# Altium PCB MocKhoaTraiTim.PcbDoc
Units mil, origin at the board's own origin, x right, y up, seen from the top; angles counter-clockwise.
Board outline 2004.38 x 2043.36 mil, 2 copper layers (Top Layer, Bottom Layer); 49 components, 37 nets, 128 pads, 3 vias.
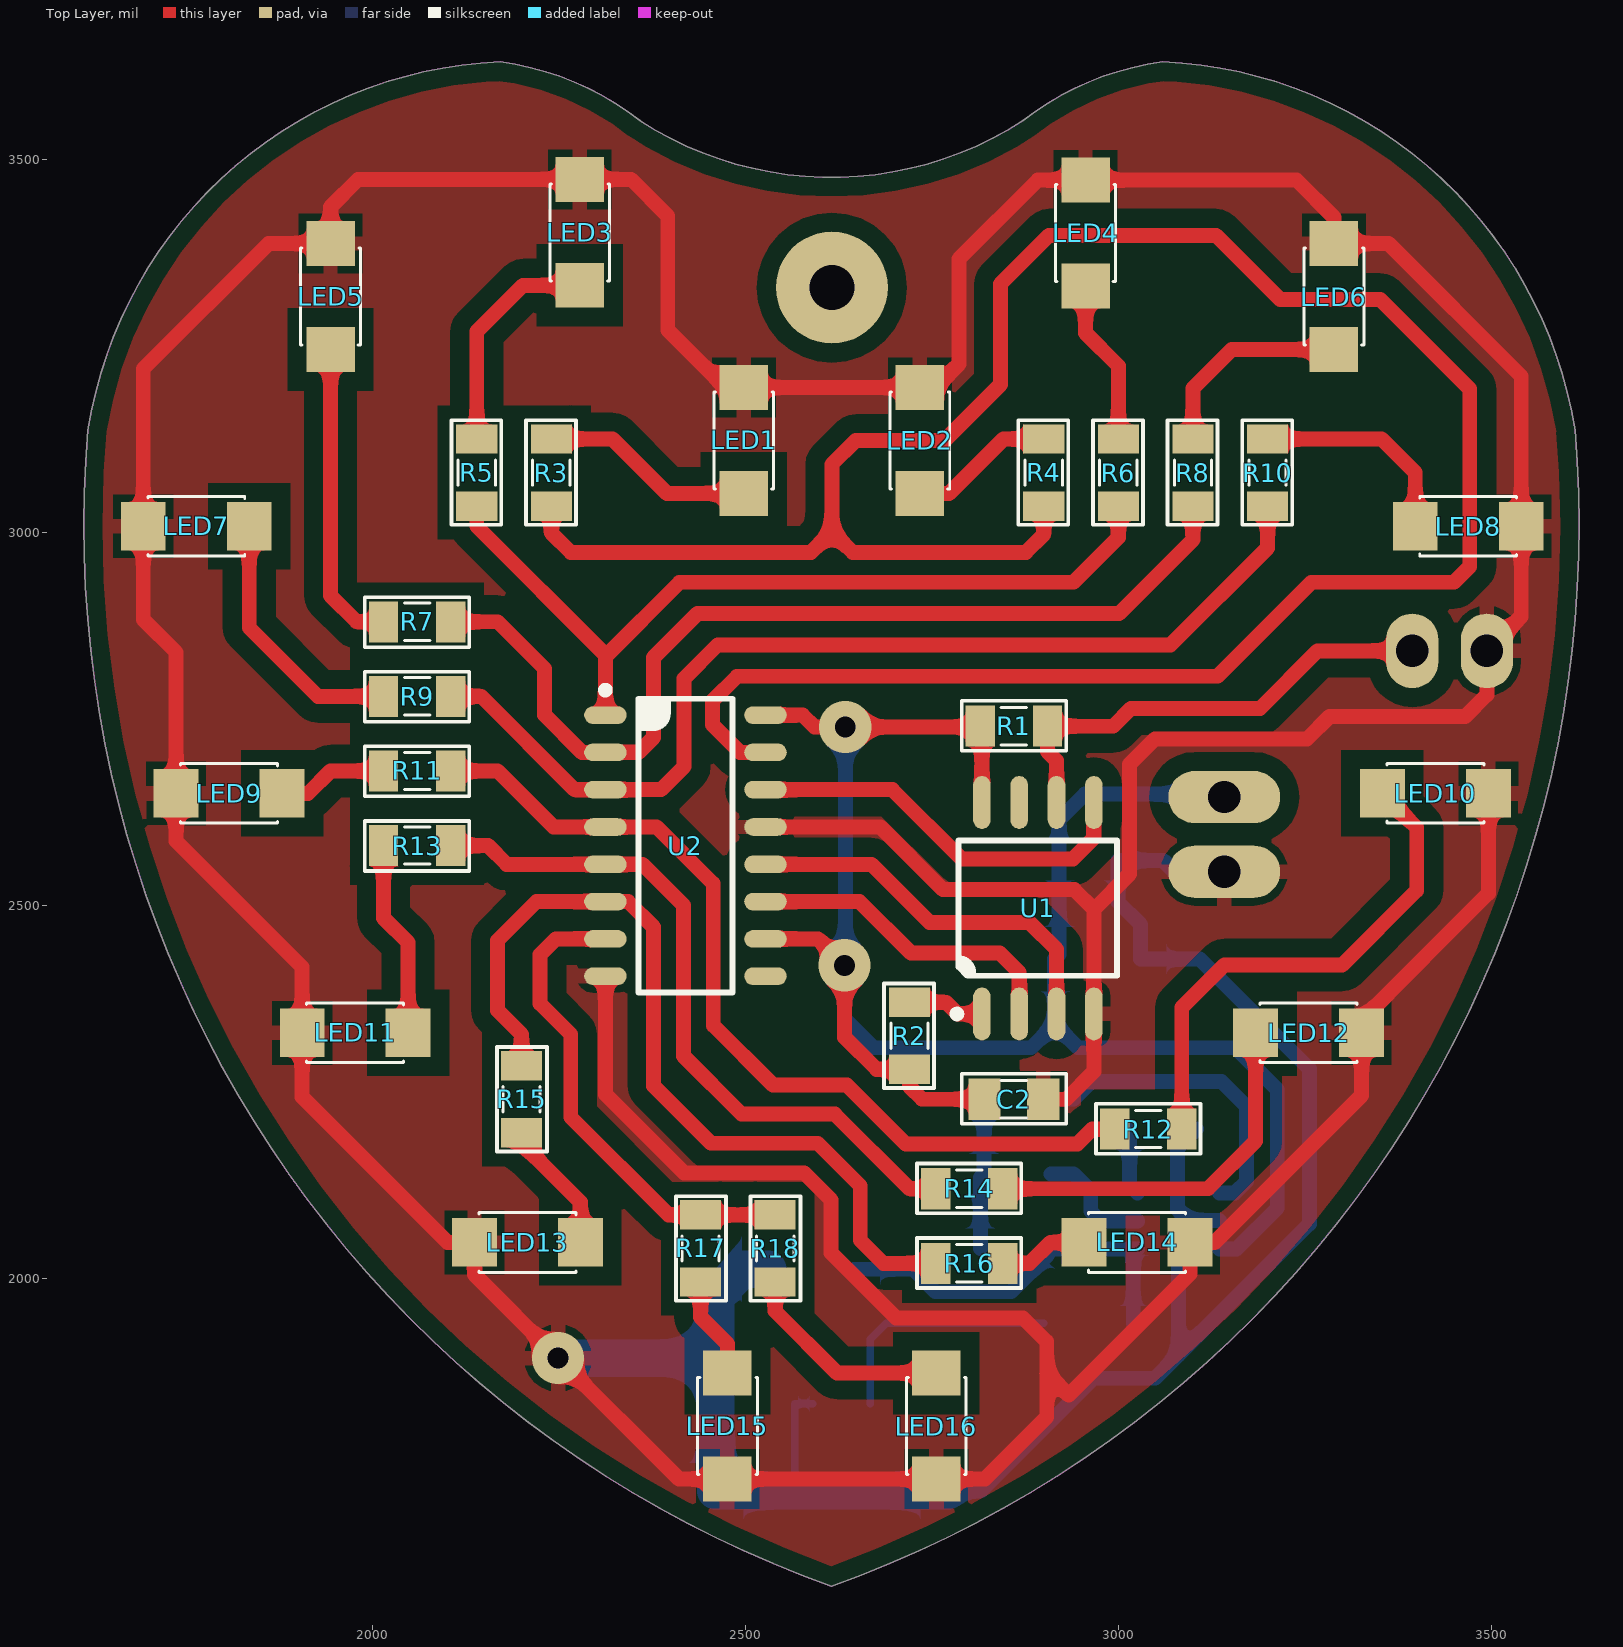
[diagram p0: Top Layer view]
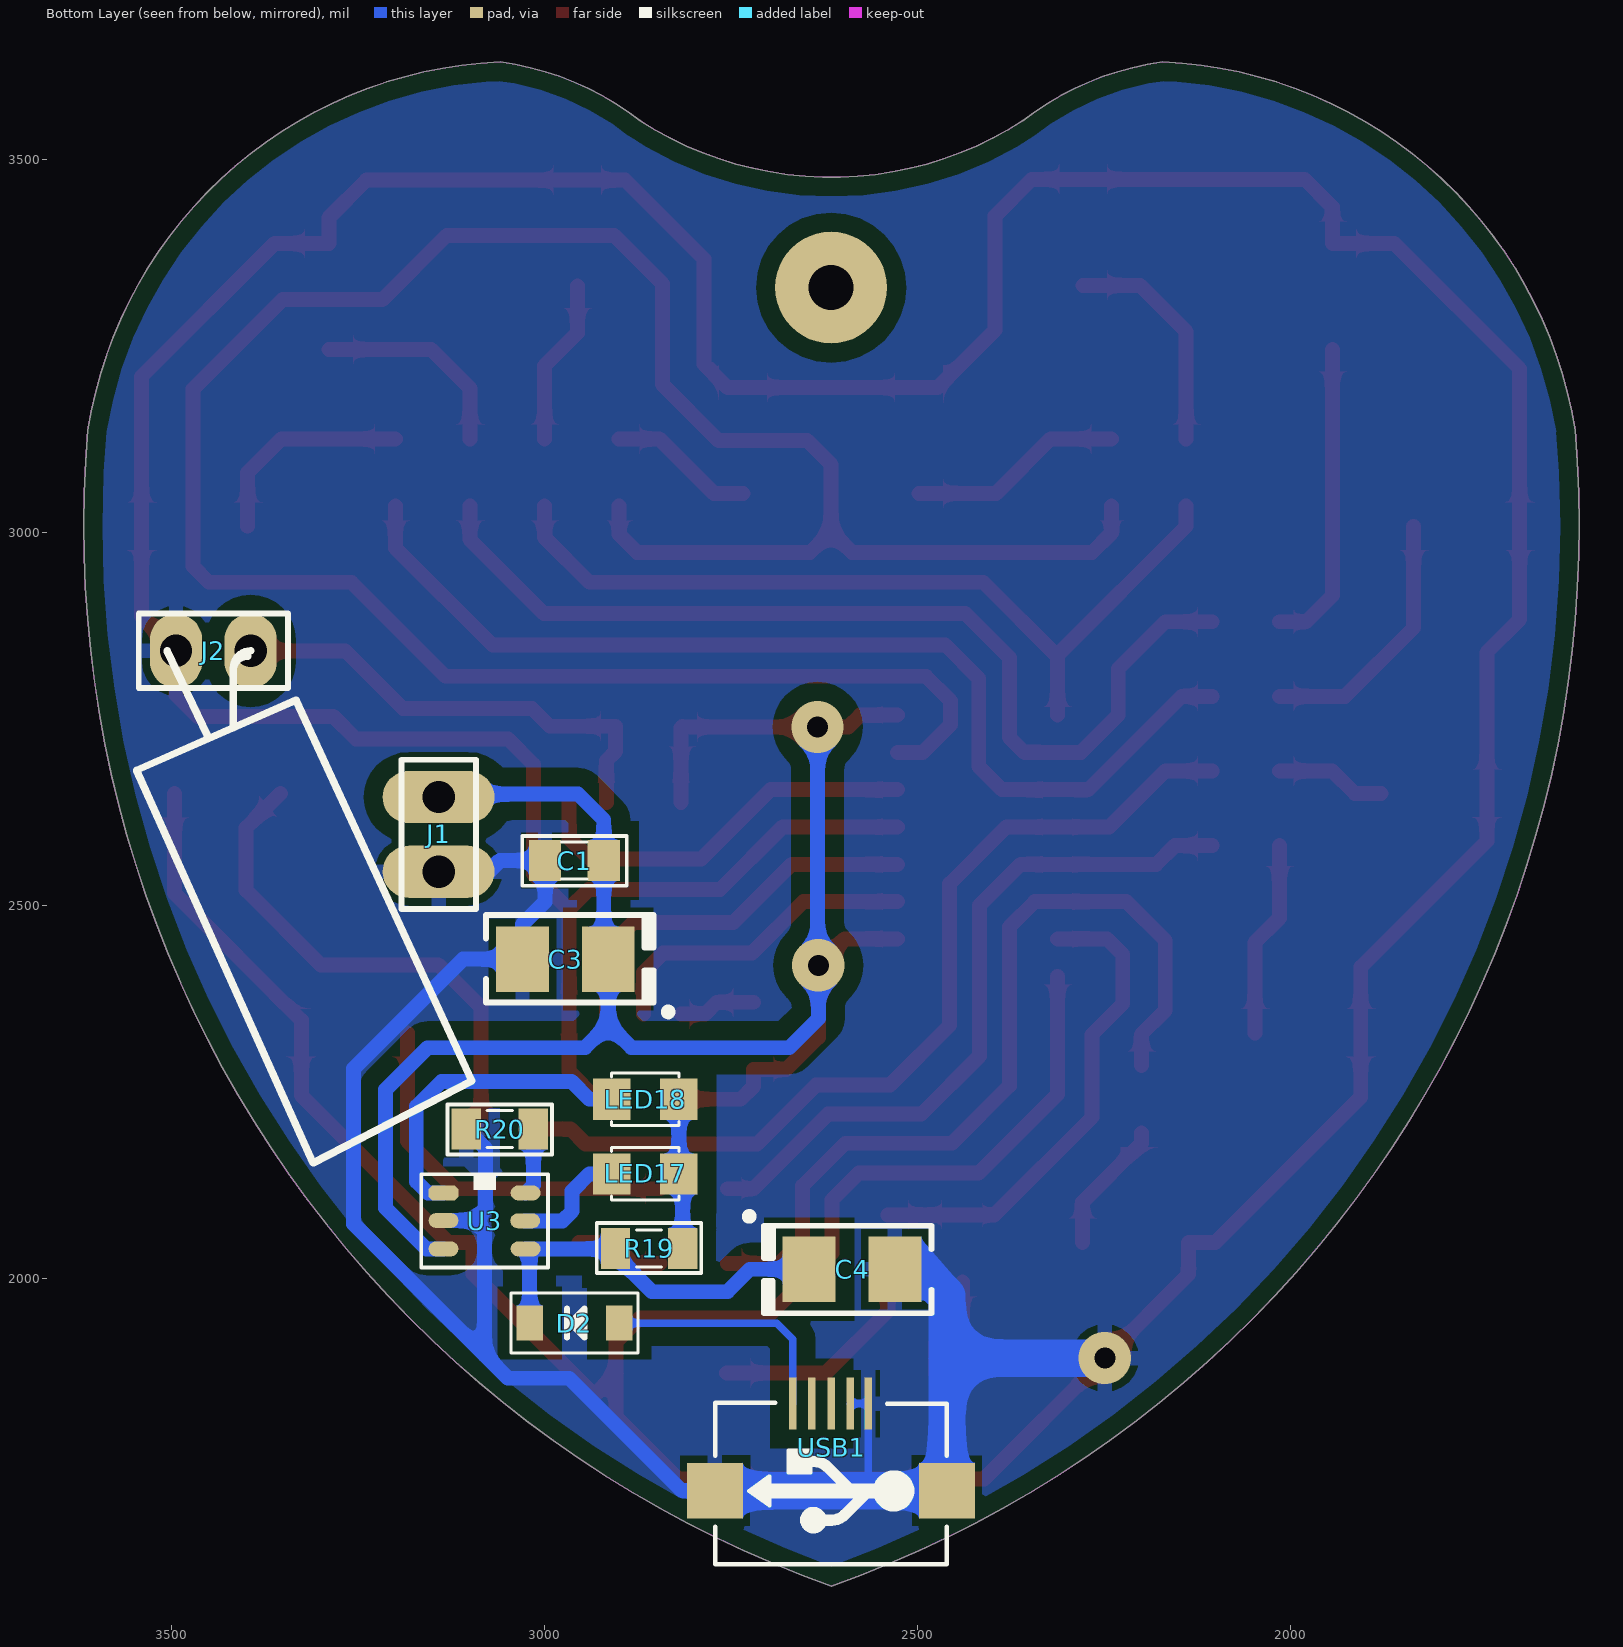
[diagram p1: Bottom Layer view, seen from below]
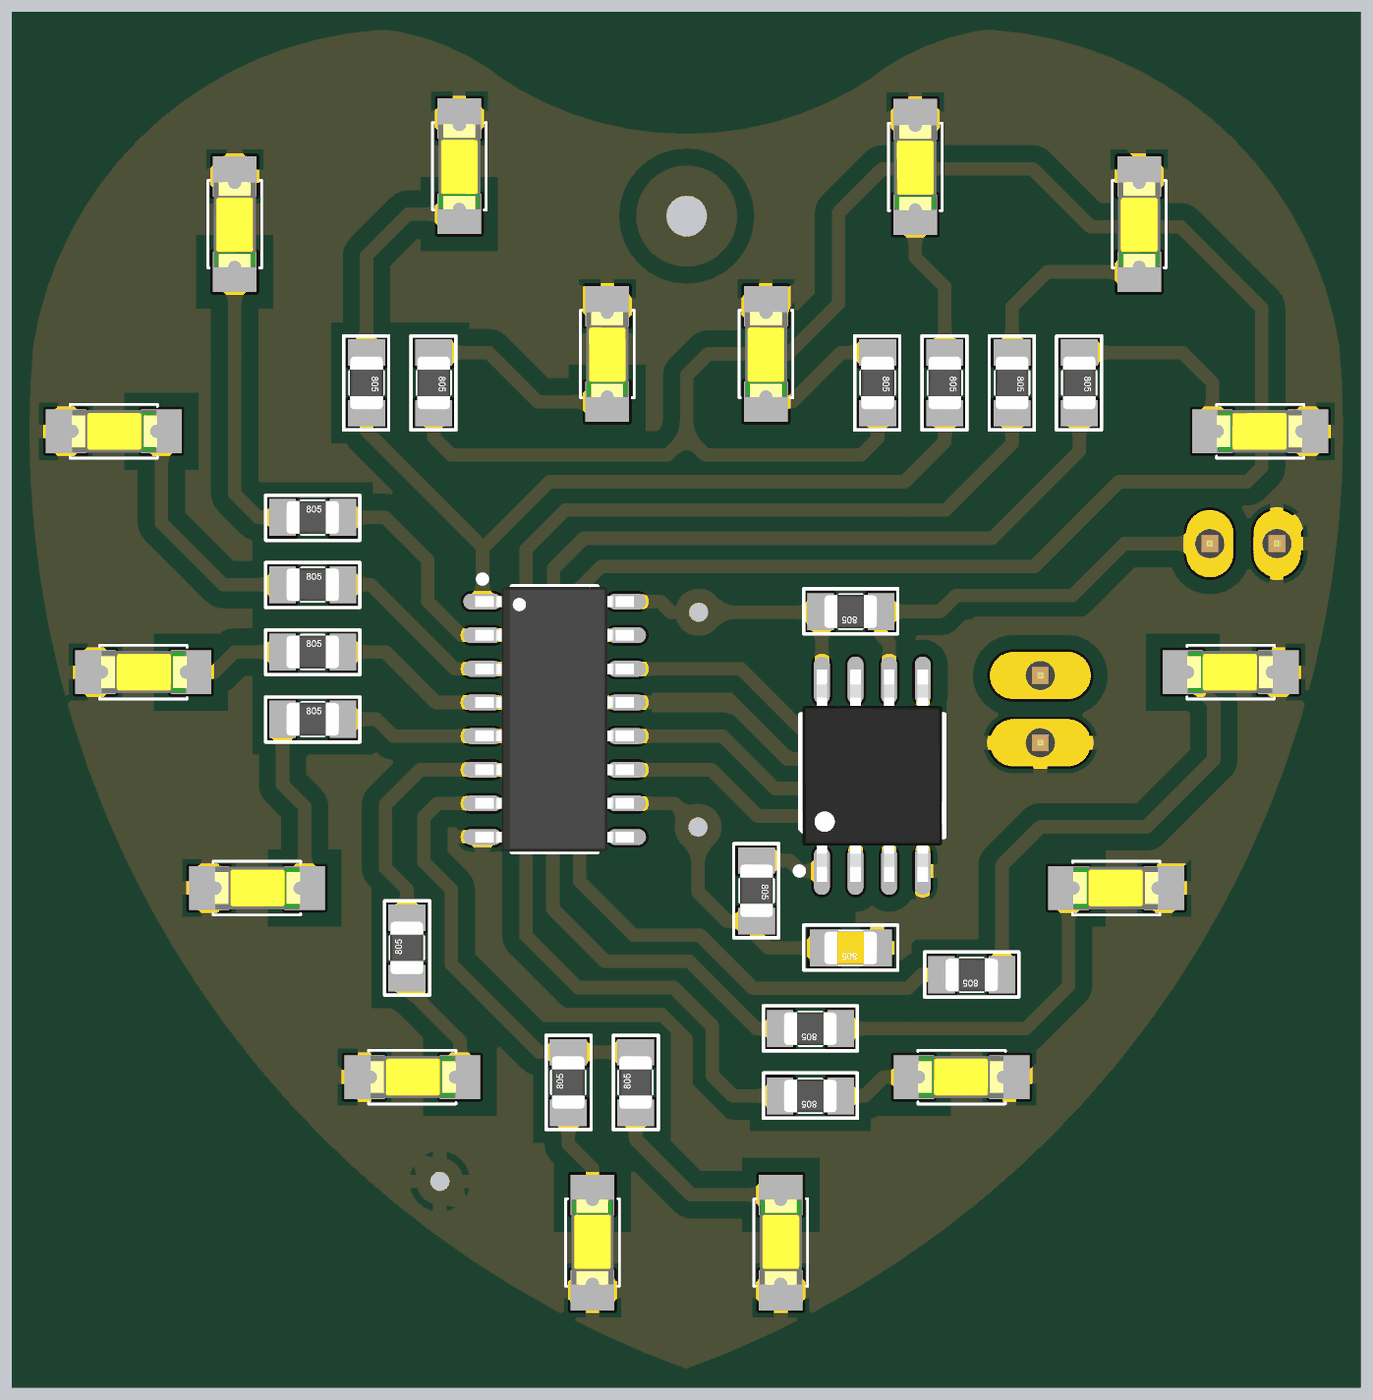
[diagram p2: 3D render of the assembled board from above, using the file's embedded part models]
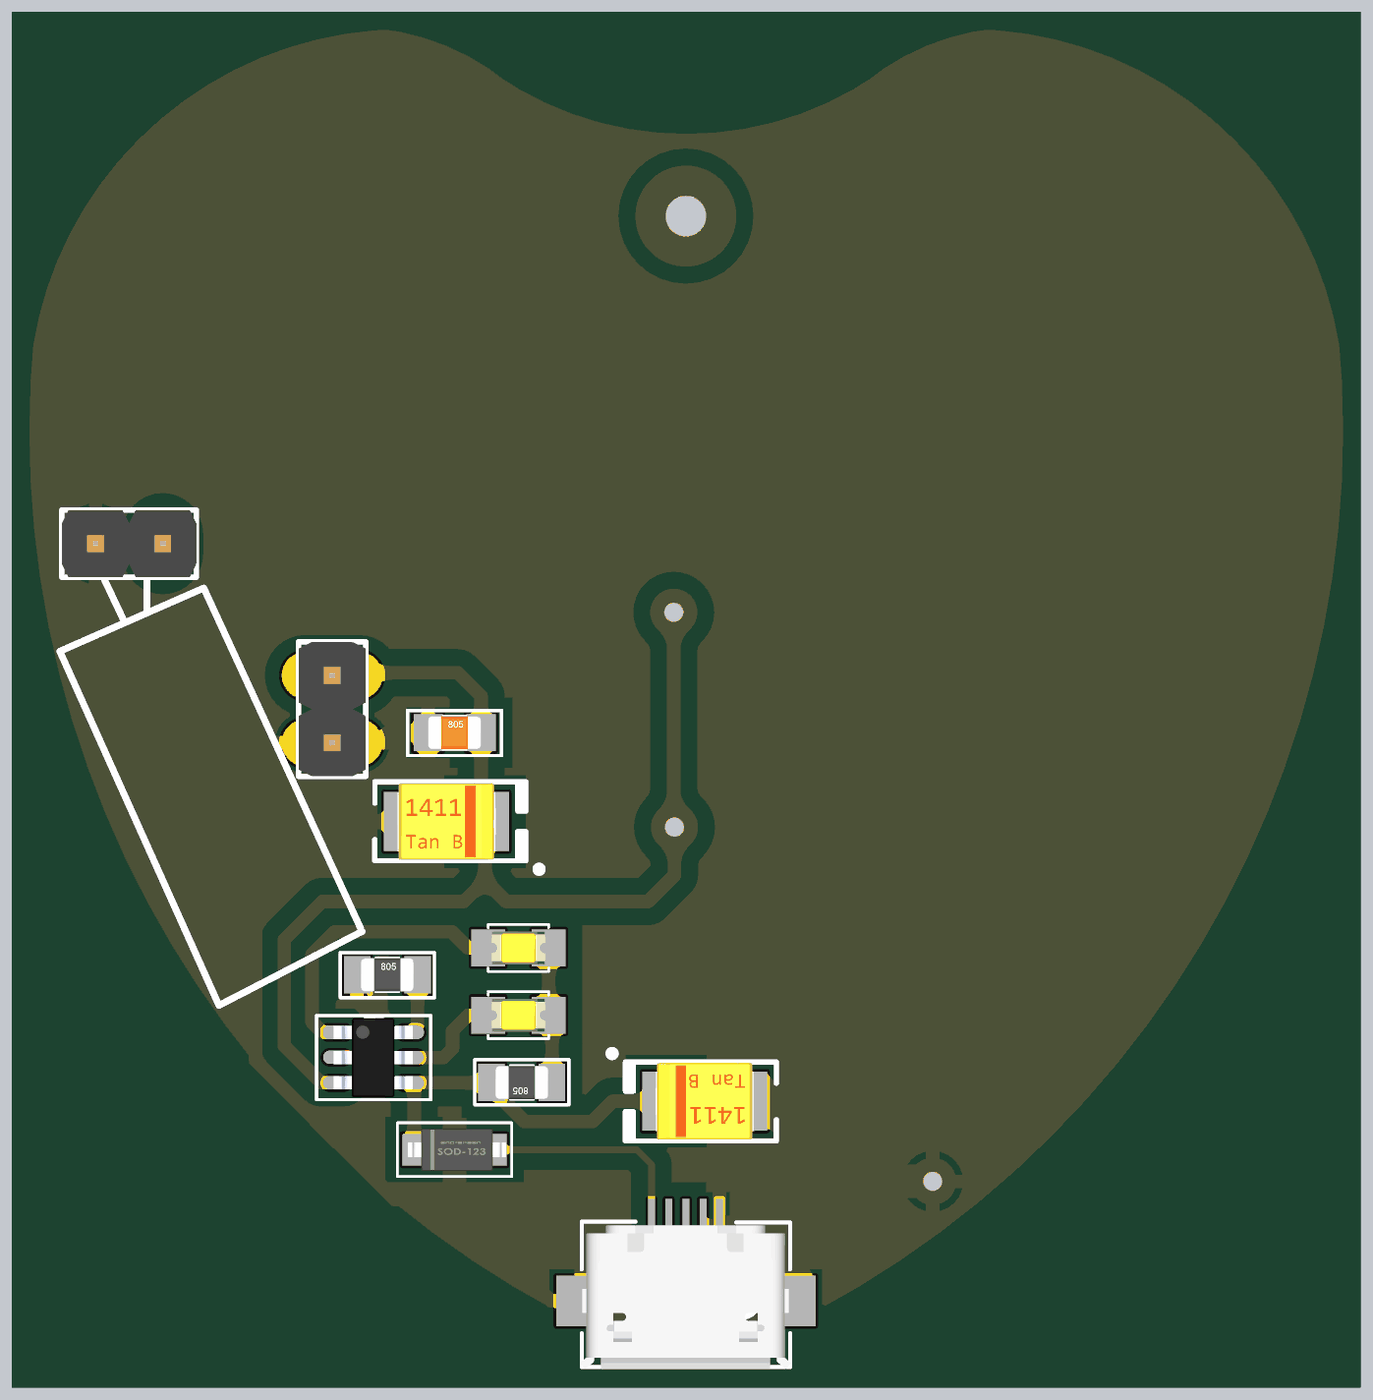
[diagram p3: 3D render of the assembled board from below, using the file's embedded part models]

## Layer stack, top to bottom
Top Solder: solder mask 0.4, Solder Resist, Dk 3.5
Top Layer: signal copper 1.4
Dielectric 1: dielectric 12.6, FR-4, Dk 4.8
Bottom Layer: signal copper 1.4
Bottom Solder: solder mask 0.4, Solder Resist, Dk 3.5

## Board outline
2615.44,1587.25 cw(c3121.37,3007.98) 1618.77,3136.89 cw(c2196.39,3046.5) 2171.37,3630.61 cw(c2119.02,3244.38) 2359.08,3551.44 ccw(c2615.44,3948.3) 2871.81,3551.44 cw(c3111.87,3244.38) 3059.52,3630.61 cw(c3034.5,3046.5) 3612.12,3136.89 cw(c2109.52,3007.98)

## Design rules (kind name [scope] priority, off if disabled: settings)
Clearance Clearance_2 [InNamedPolygon('Bottom-GND')] p1: gap=25
Clearance Clearance_1 [InNamedPolygon('Top-GND')] p2: gap=25
Clearance [All] p3: gap=10
PolygonConnect PolygonConnect_2 [All vs IsNamedPolygon('Top-GND')] p1: connectstyle=Relief reliefconductorwidth=20 reliefentries=4 polygonreliefangle="90 Angle" airgapwidth=10
PolygonConnect PolygonConnect_1 [All vs IsNamedPolygon('Bottom-GND')] p2: connectstyle=Relief reliefconductorwidth=20 reliefentries=4 polygonreliefangle="90 Angle" airgapwidth=10
PolygonConnect [All] p3: connectstyle=Relief reliefconductorwidth=10 reliefentries=4 polygonreliefangle="90 Angle" airgapwidth=10
RoutingVias [All] p1: holewidth=28 width=50 viastyle="Through Hole" minholewidth=28 minwidth=50 maxholewidth=28 maxwidth=50
SolderMaskExpansion [All] p1: expansion=4
Width [All] p1: maxlimit=50 minlimit=10 preferedwidth=20
30 further rules are at their usual default settings.

## Components (designator, comment, footprint, x,y, rotation, side; value= is the part's Value field where it differs from the comment)
C1 "100nF" CN-SMD-0805 2960,2560 r180 bottom
C2 "100nF" CN-SMD-0805 2860,2240 r180 top
C3 "10uF" CAP1411 2980,2420 r0 bottom
C4 "10uF" CAP1411 2580,2020 r180 bottom
D2 "Diode SMD" DIO-SMD-123 2960,1940 r180 bottom
J1 "BAT" JP2-D1T#1 3142,2645 r270 bottom
J2 "HDX1801" JP2-D1T#2 3494,2841 r180 bottom
LED1 "LED" LED-1206-Yellow 2498,3052 r90 top locked
LED2 "LED" LED-1206-Yellow 2734,3052 r90 top locked
LED3 "LED" LED-1206-Yellow 2278,3331 r90 top locked
LED4 "LED" LED-1206-Yellow 2956,3330 r90 top locked
LED5 "LED" LED-1206-Yellow 1944,3245 r90 top locked
LED6 "LED" LED-1206-Yellow 3289,3245 r90 top locked
LED7 "LED" LED-1206-Yellow 1835,3008 r180 top locked
LED8 "LED" LED-1206-Yellow 3398,3008 r0 top locked
LED9 "LED" LED-1206-Yellow 1879,2650 r180 top locked
LED10 "LED" LED-1206-Yellow 3354,2650 r0 top locked
LED11 "LED" LED-1206-Yellow 2048,2329 r180 top locked
LED12 "LED" LED-1206-Yellow 3184,2329 r0 top locked
LED13 "LED" LED-1206-Yellow 2279,2048 r180 top locked
LED14 "LED" LED-1206-Yellow 2954,2048 r0 top locked
LED15 "LED" LED-1206-Yellow 2476,1873 r270 top locked
LED16 "LED" LED-1206-Yellow 2756,1873 r270 top locked
LED17 "LED" LED-0805-Yellow 2820,2140 r0 bottom
LED18 "LED" LED-0805-Yellow 2820,2240 r0 bottom
R1 "4.7k" RES-SMD-0805 2860,2740 r180 top
R2 "4.7k" RES-SMD-0805 2720,2325 r270 top
R3 "100R" RES-SMD-0805 2240,3080 r270 top
R4 "100R" RES-SMD-0805 2900,3080 r270 top
R5 "100R" RES-SMD-0805 2140,3080 r270 top
R6 "100R" RES-SMD-0805 3000,3080 r270 top
R7 "100R" RES-SMD-0805 2060,2880 r0 top
R8 "100R" RES-SMD-0805 3100,3080 r270 top
R9 "100R" RES-SMD-0805 2060,2780 r0 top
R10 "100R" RES-SMD-0805 3200,3080 r270 top
R11 "100R" RES-SMD-0805 2060,2680 r0 top
R12 "100R" RES-SMD-0805 3040,2200 r180 top
R13 "100R" RES-SMD-0805 2060,2580 r0 top
R14 "100R" RES-SMD-0805 2800,2120 r180 top
R15 "100R" RES-SMD-0805 2200,2240 r90 top
R16 "100R" RES-SMD-0805 2800,2020 r180 top
R17 "100R" RES-SMD-0805 2440,2040 r90 top
R18 "100R" RES-SMD-0805 2540,2040 r90 top
R19 "1k" RES-SMD-0805 2860,2040 r0 bottom
R20 "1k" RES-SMD-0805 3060,2200 r180 bottom
U1 "ATTINY13" TINY13 2900,2500 r90 top
U2 "HC595" SOP16 2420,2580 r0 top
U3 "TP4057" SOT23-6 3080,2080 r180 bottom
USB1 "MICROUSB" MICROUSB 2621,1722 r0 bottom

## Footprints (in the part's own frame and the unit in brackets; to place one, negate y for a bottom-side part, rotate by r counter-clockwise, add the part's x,y. Pads: shape width x height; smd on the part's side, far side on the other; paste and mask are expansions set on the pad)
CAP1411 [mm]
  rect 1.8x2.23 smd: 1(-1.66,-0.2) 2(1.26,-0.2)
  silkscreen extent -3.82,-1.7 2.51,1.72, body extent -2.06,-1.65 1.67,1.25, height 2
CN-SMD-0805 [mil]
  rect 43.31x55 smd: 1(-39.36,0.01) 2(39.37,0.01)
  silkscreen extent -70,-34 70,33, body extent -39,-25 39,25, height 31
DIO-SMD-123 [mm]
  rect 0.9x1.2 smd: 1(1.524,0) 2(-1.524,0)
  silkscreen extent -2.16,-1.02 2.16,1.02, body extent -1.76,-0.8 1.94,0.8, height 1.25
JP2-D1T#1 [mil] "2 pins, 1 row, straight, gold plating"
  oval 70x150 hole 43.31: 1(0,0) 2(100,0)
  silkscreen extent -50,-50 150,50, body extent -50,-50 150,50, height 336
JP2-D1T#2 [mil] "2 pins, 1 row, straight, gold plating"
  oval 70x100 hole 43.31: 1(0,0) 2(100,0)
  silkscreen extent -50,-50 150,50, body extent -50,-50 150,50, height 336
LED-0805-Yellow [mil]
  rect 50x55 smd: 1(0,0) 2(90,0)
  silkscreen extent 0,-35 90,35, body extent 5,-25 85,25, height 43
LED-1206-Yellow [mil]
  rect 60x65 smd: 1(0,0) 2(142,0)
  silkscreen extent 6,-40 136,40, body extent 7,-31 133,32, height 43
MICROUSB [mil]
  rect 10x70 smd: 1(46.18,-110) 2(20.59,-110) 3(-5,-110) 4(-30.59,-110) 5(-55,-110)
  rect 74.8x74.8 smd: 5(-160.51,6.84) 5(150.51,6.84)
  silkscreen extent -160,-111 150,105, body extent -162,-105 153,108, height 107
RES-SMD-0805 [mil]
  rect 39.37x55 smd: 1(-45,0) 2(45,0)
  silkscreen extent -70,-34 70,33, body extent -39,-25 39,25, height 31
SOP16 [mm]
  oval 1.45x0.6 smd: 1(-2.732,4.442) 2(-2.732,3.172) 3(-2.732,1.902) 4(-2.732,0.632) 5(-2.732,-0.638) 6(-2.732,-1.908) 7(-2.732,-3.178) 8(-2.732,-4.448) 9(2.718,-4.448) 10(2.718,-3.178) 11(2.718,-1.908) 12(2.718,-0.638) 13(2.718,0.632) 14(2.718,1.902) 15(2.718,3.172) 16(2.718,4.442)
  silkscreen extent -2.86,-5 1.59,5.42, body extent -3.01,-5 2.99,5, height 1.75
SOT23-6 [mil]
  oct 40x20 smd: 1(-55.41,34.45)
  oval 40x20 smd: 2(-55.41,-2.55) 3(-55.41,-40.55) 4(54.59,-40.55) 5(54,-2.95) 6(54.59,34.45)
  silkscreen extent -85,-66 85,59, body extent -60,-62 58,56, height 51
TINY13 [mm]
  oval 1.8x0.6 smd: 1(-3.7,2.105) 2(-3.7,0.835) 3(-3.7,-0.435) 4(-3.7,-1.705) 5(3.5,-1.705) 6(3.5,-0.435) 7(3.5,0.835) 8(3.5,2.105)
  silkscreen extent -3.82,-2.5 2.2,3.08, body extent -4.11,-2.44 3.91,2.84, height 1.5

## Part data
C1 C2: library part CN
C3 C4: library part CAP-TANTALUM
D2: "Default Diode"
J1 J2: library part JP2, "WR-PHD 2.54 mm Angled Socket Header"
LED1 LED2 LED3 LED4 LED5 LED6 LED7 LED8 LED9 LED10 LED11 LED12 LED13 LED14 LED15 LED16 LED17 LED18: library part "LED SMD"
R1 R2 R3 R4 R5 R6 R7 R8 R9 R10 R11 R12 R13 R14 R15 R16 R17 R18 R19 R20: library part Res-SMD, "Resistor"
U1: library part TINY13

## Free pads (board coordinates)
  round 150 hole 60: 2(2616,3328)

## Via types
v1: diameter 70, hole 28, Top Layer to Bottom Layer, tented both sides, 3 vias

## Nets (pads, with @x,y where several pads share a name; then routed paths per layer and width w, separated by ;. In a path a pad name is that pad's centre, name@x,y a point inside that pad or via, vN(x,y) a via of type N, cw(c..) or ccw(c..) an arc to the next point about the centre after c; other vN are vias at no path point)
GND: C1.1 C2.1 C3.2 C4.2 J1.2 J2.1 LED1.2 LED2.2 LED3.2 LED4.2 LED5.2 LED6.2 LED7.2 LED8.2 LED9.2 LED10.2 LED11.2 LED12.2 LED13.2 LED14.2 LED15.2 LED16.2 R20.1 U1.4 U2.8 U2.13 U3.2 USB1.4 USB1.5 | length 11740.4
  Top Layer w20: U2.8 2312.43,2246.57 2418,2141 2579,2141 2615,2105 2615,2034 2702,1947 2872,1947 2904,1915 2904,1873 ; U2.13 2681.1,2604.9 2765,2521 2941,2521 2967.13,2494.87 2967.13,2494.13 ; C2.1 2929.99,2239.99 2967.13,2277.13 U1.4 2967.13,2494.13 ; LED10.2 3496,2516 3326,2346 LED12.2 3326,2245 3129,2048 LED14.2 3096,2006 2933.5,1843.5 2904,1873 ; 2904,1873 2904,1814 2821,1731 LED16.2 LED15.2 2411,1731 v1(2249,1893) 2137,2005 LED13.2 2101,2048 1906,2243 LED11.2 1906,2417 1737,2586 LED9.2 1737,2839 1693,2883 LED7.2 1693,3219 1861,3387 LED5.2 1944,3436 1981,3473 LED3.2 2347,3473 2396,3424 2396,3271 2473,3194 LED1.2 LED2.2 2755,3194 2786.5,3225.5 2786.5,3366.5 2892,3472 LED4.2 3239,3472 3289,3422 LED6.2 3362,3387 3540,3209 LED8.2 3540,2887 J2.1 3494,2782 3465,2753 3283,2753 3253,2723 3049,2723 3015,2689 3015,2542 2967.13,2494.13
  Bottom Layer w10: 2565,1715.16 2566,1716.16 2566,1832 USB1.4
  Bottom Layer w20: USB1.5@2771.51,1715.16 2816.16,1715.16 2967,1866 3049,1866 3080.5,1897.5 ; R20.1 3079,2174 3079,2093 3094.55,2077.45 ; U3.2 3094.55,2077.45 ; J1.2 3075,2545 3059.99,2560.01 C1.1 2999.36,2504.64 3029.61,2474.39 C3.2 3109.13,2427.87 3256,2281 3256,2073 3080.5,1897.5 ; 3080.5,1897.5 3080.5,2063.41 3094.55,2077.45
  Bottom Layer w50: v1(2249,1893) 2460.49,1893 ; C4.2 2496.13,2012.13 2460.49,1976.49 2460.49,1893 ; USB1.5@2771.51,1715.16 2565,1715.16 2460.49,1715.16 2460.49,1893
NetC4_1: C4.1 D2.2 R19.2 U3.4 | length 523.8
  Bottom Layer w20: C4.1 2724.87,2012.13 2755,1982 2856,1982 2905,2031 R19.2 2905.55,2039.45 U3.4 3020,2034.04 D2.2
NetD2_1: D2.1 USB1.1 | length 328
  Bottom Layer w10: USB1.1 2667.18,1918.18 2689,1940 D2.1
NetJ2_2: J2.2 R1.1 U1.6 | length 638.1
  Top Layer w20: U1.6 2917.13,2693.87 2905,2706 R1.1 2993,2740 3017,2764 3190,2764 3267,2841 J2.2
NetLED1_1: LED1.1 R3.1 | length 288.2
  Top Layer w20: R3.1 2322,3125 2395,3052 LED1.1
NetLED2_1: LED2.1 R4.1 | length 196.2
  Top Layer w20: LED2.1 2773,3052 2846,3125 R4.1
NetLED3_1: LED3.1 R5.1 | length 307.7
  Top Layer w20: R5.1 2140,3269 2202,3331 LED3.1
NetLED4_1: LED4.1 R6.1 | length 223.2
  Top Layer w20: LED4.1 2956,3267 3000,3223 R6.1
NetLED5_1: LED5.1 R7.1 | length 415.5
  Top Layer w20: LED5.1 1944,2915 1979,2880 R7.1
NetLED6_1: LED6.1 R8.1 | length 278.5
  Top Layer w20: R8.1 3100,3193 3152,3245 LED6.1
NetLED7_1: LED7.1 R9.1 | length 354.1
  Top Layer w20: LED7.1 1835,2872 1927,2780 R9.1
NetLED8_1: LED8.1 R10.1 | length 288.6
  Top Layer w20: R10.1 3353,3125 3398,3080 LED8.1
NetLED9_1: LED9.1 R11.1 | length 148.4
  Top Layer w20: LED9.1 1914,2650 1944,2680 R11.1
NetLED10_1: LED10.1 R12.1 | length 692.1
  Top Layer w20: R12.1 3085,2363 3142,2420 3300,2420 3400,2520 3400,2604 LED10.1
NetLED11_1: LED11.1 R13.1 | length 264.7
  Top Layer w20: R13.1 2015,2483 2048,2450 LED11.1
NetLED12_1: LED12.1 R14.1 | length 510.5
  Top Layer w20: R14.1 3120,2120 3184,2184 LED12.1
NetLED13_1: LED13.1 R15.1 | length 179.7
  Top Layer w20: R15.1 2200,2181 2279,2102 LED13.1
NetLED14_1: LED14.1 R16.1 | length 131.9
  Top Layer w20: R16.1 2881,2020 2909,2048 LED14.1 LED14.1@2946,2040
NetLED15_1: LED15.1 R17.1 | length 136.9
  Top Layer w20: R17.1 2440,1948 2476,1912 LED15.1
NetLED16_1: LED16.1 R18.1 | length 289.4
  Top Layer w20: R18.1 2540,1956 2623,1873 LED16.1
NetLED17_1: LED17.1 LED18.1 R19.1 | length 202.1
  Bottom Layer w20: R19.1 2815,2135 LED17.1 LED18.1
NetLED17_2: LED17.2 U3.5 | length 157.9
  Bottom Layer w20: LED17.2 2940,2140 2963,2117 2963,2090 2975.95,2077.05 U3.5
NetLED18_2: LED18.2 U3.1 | length 429.1
  Bottom Layer w20: LED18.2 2940,2240 2964,2264 3138,2264 3172,2230 3172,2130 3156.45,2114.45 U3.1
NetR2_1: R2.1 U1.1 | length 103.6
  Top Layer w20: R2.1 2769,2370 2784.67,2354.33 U1.1
NetR3_2: R3.2 R4.2 U2.15 | length 3460.4
  Top Layer w20: R3.2 2240,2999 2266,2973 2588,2973 2616,3001 ; U2.15 2493.1,2704.9 2456,2742 2456,2774 2489,2807 3133,2807 3259,2933 3450,2933 3471,2954 3471,3192 3351,3312 3217,3312 3131,3398 2907,3398 2842,3333 2842,3198 2767,3123 2648,3123 2616,3091 2616,3001 ; R4.2 2900,2997 2876,2973 2644,2973 2616,3001
NetR5_2: R5.2 R6.2 U2.1 | length 1147.2
  Top Layer w20: R5.2 2140,3008 2312.43,2835.57 2312.43,2833.43 ; U2.1 2312.43,2833.43 ; R6.2 3000,2993 2940,2933 2412,2933 2312.43,2833.43
NetR7_2: R7.2 R8.2 U2.2 | length 1329.6
  Top Layer w20: R7.2 2168,2880 2231,2817 2231,2755 2281.1,2704.9 U2.2 2356.9,2704.9 2377,2725 2377,2832 2436,2891 3001,2891 3100,2990 R8.2
NetR9_2: R9.2 R10.2 U2.3 | length 1406.2
  Top Layer w20: R9.2 2146,2780 2271.1,2654.9 U2.3 2386.9,2654.9 2418,2686 2418,2804 2463,2849 3070,2849 3200,2979 R10.2
NetR11_2: R11.2 R12.2 U2.4 | length 1216.7
  Top Layer w20: R11.2 2168,2680 2243.1,2604.9 U2.4 2381.1,2604.9 2457,2529 2457,2339 2537,2259 2636,2259 2715,2180 2945,2180 2965,2200 R12.2
NetR13_2: R13.2 R14.2 U2.5 | length 958.9
  Top Layer w20: R13.2 2155,2580 2180.1,2554.9 U2.5 2362.1,2554.9 2417,2500 2417,2298 2495,2220 2620,2220 2720,2120 R14.2
NetR15_2: R15.2 R16.2 U2.6 | length 1158.1
  Top Layer w20: R15.2 2200,2327 2168,2359 2168,2453 2219.9,2504.9 U2.6 2343.1,2504.9 2377,2471 2377,2258 2454,2181 2597,2181 2654,2124 2654,2051 2685,2020 R16.2
NetR17_2: R17.2 R18.2 U2.7 | length 659.3
  Top Layer w20: U2.7 2245.9,2454.9 2225,2434 2225,2368 2266,2327 2266,2216 2397,2085 R17.2 R18.2
NetR20_2: R20.2 U3.6 | length 89.9
  Bottom Layer w20: R20.2 3015,2124.87 U3.6
NetU1_2: U1.2 U2.11 | length 435
  Top Layer w20: U2.11 2653.1,2504.9 2722,2436 2841,2436 2867.13,2409.87 U1.2
NetU1_3: U1.3 U2.12 | length 523.9
  Top Layer w20: U2.12 2669.1,2554.9 2747,2477 2881,2477 2917.13,2440.87 U1.3
NetU1_5: U1.5 U2.14 | length 537.9
  Top Layer w20: U2.14 2697.1,2654.9 2790,2562 2939,2562 2967.13,2590.13 U1.5
VCC: C1.2 C2.2 C3.1 J1.1 R1.2 R2.2 U1.8 U2.10 U2.16 U3.3 | length 2658.2
  Top Layer w20: U2.10 2597.6,2454.9 v1@2631.25,2421.25 ; U2.16 2577,2754.9 2592.9,2739 v1(2634,2739) 2814,2739 R1.2 2817.13,2737.88 U1.8 ; v1(2633,2419.5) 2633,2323 2676,2280 R2.2 2720,2257 2737.01,2239.99 C2.2
  Bottom Layer w20: v1(2634,2739) 2634,2420.5 v1(2633,2419.5) 2633,2348 2672,2309 2883.29,2309 2914.65,2340.35 ; U3.3 3158.45,2039.45 3213,2094 3213,2253 3157,2309 2946,2309 2914.65,2340.35 ; J1.1 3138,2649 2955,2649 2920.63,2614.63 C1.2 2920.63,2433.85 C3.1 2914.65,2340.35
pads on no net: U1.7 U2.9 USB1.2 USB1.3

## Polygon pours and split planes (outlines as drawn)
GND on Top Layer "Top-GND" (solid, remove dead copper, pour order 0): 2615.44,1587.25 cw(c3121.37,3007.98) 1618.77,3136.89 cw(c2196.39,3046.5) 2171.37,3630.61 cw(c2119.02,3244.38) 2359.08,3551.44 ccw(c2615.44,3948.3) 2871.81,3551.44 cw(c3111.87,3244.38) 3059.52,3630.61 cw(c3034.5,3046.5) 3612.12,3136.89 cw(c2109.52,3007.98)
GND on Bottom Layer "Bottom-GND" (solid, remove dead copper, pour order 1): 2615.44,1587.25 cw(c3121.37,3007.98) 1618.77,3136.89 cw(c2196.39,3046.5) 2171.37,3630.61 cw(c2119.02,3244.38) 2359.08,3551.44 ccw(c2615.44,3948.3) 2871.81,3551.44 cw(c3111.87,3244.38) 3059.52,3630.61 cw(c3034.5,3046.5) 3612.12,3136.89 cw(c2109.52,3007.98)

## Keep-outs
Keep-Out Layer:
  the board outline again, w0.5

## Silkscreen, mask and mechanical layers (free items; w line width, h text height)
Bottom Overlay:
  lines w10: 3394,2841 cw(c3394,2818) 3417,2818 ; 3398,2834 cw(c3398,2814.77) 3417.23,2814.77 3417.23,2738 ; 3452,2727 3506,2841 ; 3097.55,2264.5 3310.34,2154.52 3547,2681 3333,2775 3097.55,2264.5